# EAGLE board RS485_HiLowPWM_V1-autoR1 (EAGLE 6.3)
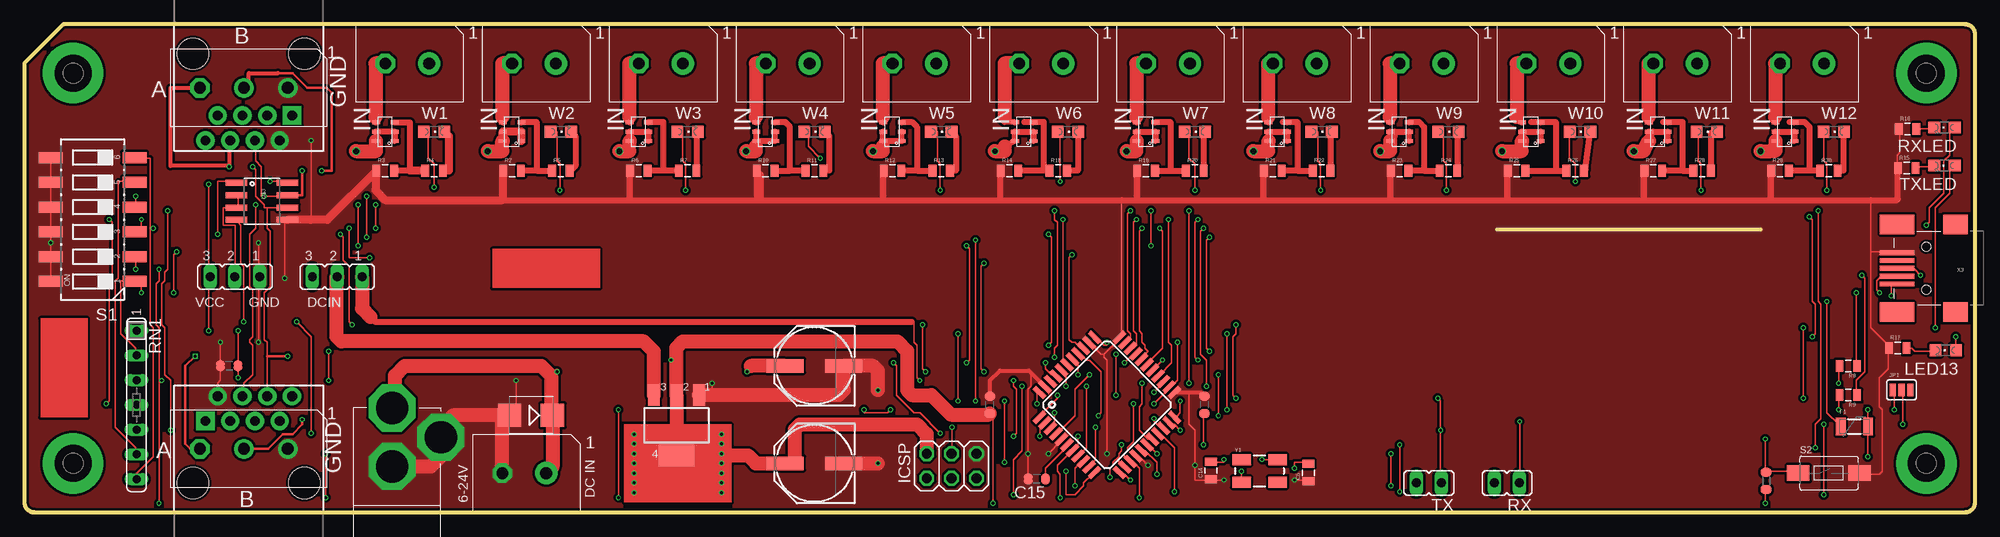
[diagram p0: board, top side]
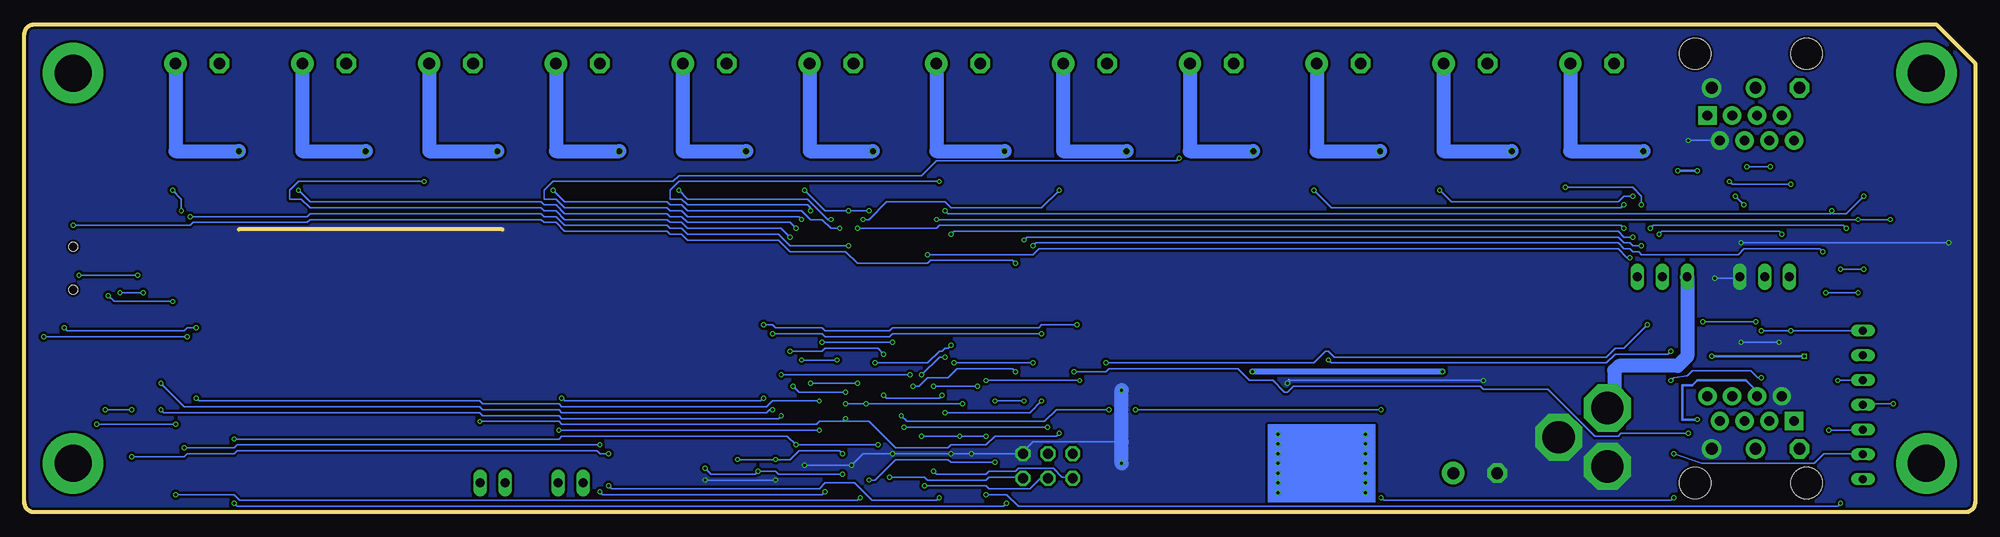
[diagram p1: board, bottom side, seen from below]

Size 200 x 50 mm. Coordinates in mm from the lower left corner, seen from the top.
Outline: 0,46 0,1 arc90 1,0 199,0 arc90 200,1 200,49 arc90 199,50 4,50 0,46
Copper layers (1*16): Top 0.035mm / dielectric 1.5mm / Bottom 0.035mm
Design rules "Fast_ChinaPCB-2012-6mil-off *": minimum track width 6mil, minimum drill 0.3mm, track to track 6mil, track to pad 6mil, pad to pad 6mil, via to via 6mil, smd to smd 6mil, copper to edge 10mil, drill to drill 15mil, minimum pad ring 8mil, minimum via ring 4mil, stop-mask expansion 2mil, vias tented up to drill 13mil, thermal gap 10mil
Net classes: 0 default: width 0.152 mm, drill 0.152 mm, clearance 0.152 mm; 1 power: width 0.152 mm, drill 0.152 mm, clearance 0.152 mm; 2 VIN: width 0.152 mm, drill 0.152 mm, clearance 0.305 mm
Milling: 1 lines

## Footprints (pad centres in the part's own frame; a part is rotated, then mirrored left to right if it is on the bottom)
C0603-ROUND = smd 0.898 x 1.1: 1 -0.889,0; 2 0.889,0
0805 = smd 0.8 x 1.2: 1 -0.9,0; 2 0.9,0
PANASONIC_E = smd 3.8 x 1.4: + 3,0; - -3,0
SMB = smd 2.4 x 2.4: A 2.2,0; C -2.2,0
PTC-1206 = smd 1 x 1.8: 1 -1.4,0; 2 1.4,0
TQFP44 = smd 1.5 x 0.5: 1 -5.8,4; 2 -5.8,3.2; 3 -5.8,2.4; 4 -5.8,1.6; 5 -5.8,0.8; 6 -5.8,0; 7 -5.8,-0.8; 8 -5.8,-1.6; 9 -5.8,-2.4; 10 -5.8,-3.2; 11 -5.8,-4; 23 5.8,-4; 24 5.8,-3.2; 25 5.8,-2.4; 26 5.8,-1.6; 27 5.8,-0.8; 28 5.8,0; 29 5.8,0.8; 30 5.8,1.6; 31 5.8,2.4; 32 5.8,3.2; 33 5.8,4 | smd 0.5 x 1.5: 12 -4,-5.8; 13 -3.2,-5.8; 14 -2.4,-5.8; 15 -1.6,-5.8; 16 -0.8,-5.8; 17 0,-5.8; 18 0.8,-5.8; 19 1.6,-5.8; 20 2.4,-5.8; 21 3.2,-5.8; 22 4,-5.8; 34 4,5.8; 35 3.2,5.8; 36 2.4,5.8; 37 1.6,5.8; 38 0.8,5.8; 39 0,5.8; 40 -0.8,5.8; 41 -1.6,5.8; 42 -2.4,5.8; 43 -3.2,5.8; 44 -4,5.8
SOT223 = smd 1.219 x 2.235: 1 -2.311,-3.099; 2 0,-3.099; 3 2.311,-3.099 | smd 3.6 x 2.2: 4 0,3.099
2X03 = drill 1.016 octagon: 1 -2.54,-1.27; 2 -2.54,1.27; 3 0,-1.27; 4 0,1.27; 5 2.54,-1.27; 6 2.54,1.27
SJ_3 = smd 0.635 x 1.27: 1 -0.889,0; 2 0,0; 3 0.889,0
JP2 = drill 0.914 long: 1 -2.54,0; 2 0,0; 3 2.54,0
SMTSO-256-ET = drill 3.81 pad 6.198: P$1 0,0
CHIPLED_0805 = smd 1.2 x 1.2: A 0,-1.05; C 0,1.05
RJ45-8 = drill 1 pad 1.88 square: 1 -4.445,6.35 | drill 1 pad 1.88: 2 -3.175,8.89; 3 -1.905,6.35; 4 -0.635,8.89; 5 0.635,6.35; 6 1.905,8.89; 7 3.175,6.35; 8 4.445,8.89 | hole 3.2: -5.715,0; 5.715,0
R0603-ROUND = smd 0.898 x 1.1: 1 -0.889,0; 2 0.889,0
SIL7 = drill 0.813 long: 1 -7.62,0; 2 -5.08,0; 3 -2.54,0; 4 0,0; 5 2.54,0; 6 5.08,0; 7 7.62,0
JP1 = drill 0.914 long: 1 0,-1.27; 2 0,1.27
CTS-219-06 = smd 1.13 x 2.44: 1 -6.35,-4.3; 2 -3.81,-4.3; 3 -1.27,-4.3; 4 1.27,-4.3; 5 3.81,-4.3; 6 6.35,-4.3; 7 6.35,4.3; 8 3.81,4.3; 9 1.27,4.3; 10 -1.27,4.3; 11 -3.81,4.3; 12 -6.35,4.3
TACTILE-SWITCH-1101NE = smd 2.3 x 1.6: P$1 -3.15,0; P$2 3.15,0
DECADE-NSS30201MR6T1G = smd 0.4 x 0.8: 1 -0.95,-0.95; 2 0,-0.95; 5 0,0.95; 6 -0.95,0.95; B 0.95,-0.95; E 0.95,0.95
DECADE-5MM-CON-1X2 = drill 1.2 pad 2.3: 1 4.5,0 | drill 1.2 pad 2 octagon: 2 0,0
SO08 = smd 0.61 x 2.21: 1 -1.905,-2.616; 2 -0.635,-2.616; 3 0.635,-2.616; 4 1.905,-2.616; 5 1.905,2.616; 6 0.635,2.616; 7 -0.635,2.616; 8 -1.905,2.616
DECADE-5MM-CON-1X3 = drill 1.2 pad 2: 1 9,0; 2 4.5,0 | drill 1.2 pad 2 octagon: 3 0,0
DC-21MM = drill 3.302 pad 4.826 octagon: 1 -5.08,-3.353; 2 -0.076,-6.35; 3 -0.076,-0.356
USB-MINIB-OLD = smd 2.5 x 2: 1 -3,-4.5; 2 -3,4.5 | smd 3.5 x 2: 3 3,-4.5; 4 3,4.5 | smd 3.5 x 0.5: D+ 3,0; D- 3,0.8; GND 3,-1.6; ID 3,-0.8; VBUS 3.01,1.61 | hole 0.9: 0,2.2; 0,-2.2
CRYSTAL-SMD-5X3 = smd 1.9 x 1.1: 1 -1.85,-1.15; 2 1.85,-1.15; 3 1.85,1.15; 4 -1.85,1.15

## Placement (x,y rotation side)
C3  100n  [C0603-ROUND]  121,11 90 top
C5  22p  [0805]  131.65,4.06 90 top
C6  100n  [C0603-ROUND]  21,15 180 top
C7  100n  [C0603-ROUND]  99,11 90 top
C8  47u  [PANASONIC_E]  81,5 180 top
C11  100uF  [PANASONIC_E]  81,15 180 top
C14  22p  [0805]  121.65,4.27 90 top
C15  100n  [C0603-ROUND]  103.8,3.41 180 top
D1  M7  [SMB]  51.95,9.93 180 top
F1  PTCSMD  [PTC-1206]  187.63,8.78 0 top
IC1  ATMEGA32U4-AU  [TQFP44]  111,11 45 top
IC4  MC33269ST-5  [SOT223]  66.85,8.91 180 top
ICSP  ICSP  [2X03]  95.06,4.74 0 top
JP1  PW_SW  [SJ_3]  192.46,12.54 0 top
JP3  PW_SOURCE  [JP2]  32.07,24.13 180 top
JP4  RS485_PW  [JP2]  21.57,24.13 180 top
JP10  M01-SMTSO-256-ET  [SMTSO-256-ET]  195,5 0 top
JP11  M01-SMTSO-256-ET  [SMTSO-256-ET]  5,5 0 top
JP12  M01-SMTSO-256-ET  [SMTSO-256-ET]  195,45 0 top
JP13  M01-SMTSO-256-ET  [SMTSO-256-ET]  5,45 0 top
LED13  [CHIPLED_0805]  196.99,16.59 90 top
OUT1  RJ45-8PTH  [RJ45-8]  23,47 180 top
OUT2  RJ45-8PTH  [RJ45-8]  23,3 0 top
R1  10k  [R0603-ROUND]  178.57,3.22 270 top
R2  10K  [0805]  50,35 0 top
R3  10K  [0805]  37,35 0 top
R4  1K  [0805]  42,35 0 top
R5  1K  [0805]  55,35 0 top
R6  10K  [0805]  63,35 0 top
R7  1K  [0805]  68,35 0 top
R8  22  [0805]  187,15 180 top
R9  22  [0805]  187,12 180 top
R10  10K  [0805]  76,35 0 top
R11  1K  [0805]  81,35 0 top
R12  10K  [0805]  89,35 0 top
R13  1K  [0805]  94,35 0 top
R14  10K  [0805]  101,35 0 top
R15  330  [0805]  192.99,35.27 0 top
R16  330  [0805]  193.07,39.27 0 top
R17  330  [0805]  192.07,16.84 0 top
R18  1K  [0805]  106,35 0 top
R19  10K  [0805]  115,35 0 top
R20  1K  [0805]  120,35 0 top
R21  10K  [0805]  128,35 0 top
R22  1K  [0805]  133,35 0 top
R23  10K  [0805]  141,35 0 top
R24  1K  [0805]  146,35 0 top
R25  10K  [0805]  153,35 0 top
R26  1K  [0805]  159,35 0 top
R27  10K  [0805]  167,35 0 top
R28  1K  [0805]  172,35 0 top
R29  10K  [0805]  180,35 0 top
R30  1K  [0805]  185,35 0 top
RN1  1K  [SIL7]  11.5,11 270 top
RX  RX_TXO  [JP1]  152,3 90 top
RXLED  [CHIPLED_0805]  196.86,39.43 90 top
S1  219-06  [CTS-219-06]  7,30 90 top
S2  RES  [TACTILE-SWITCH-1101NE]  185,4 0 top
TX  TX_RXI  [JP1]  144,3 90 top
TXLED  [CHIPLED_0805]  196.86,35.53 90 top
U$1  DECADE-NSS30201MR6T1G  [DECADE-NSS30201MR6T1G]  37,39 90 top
U$2  DECADE-5MM-CONN  [DECADE-5MM-CON-1X2]  37,46 0 top
U$3  RS485SOIC  [SO08]  24.36,31.86 270 top
U$4  DECADE-NSS30201MR6T1G  [DECADE-NSS30201MR6T1G]  50,39 90 top
U$5  DECADE-5MM-CONN  [DECADE-5MM-CON-1X2]  50,46 0 top
U$6  DECADE-NSS30201MR6T1G  [DECADE-NSS30201MR6T1G]  63,39 90 top
U$7  DECADE-5MM-CONN  [DECADE-5MM-CON-1X2]  63,46 0 top
U$8  DECADE-NSS30201MR6T1G  [DECADE-NSS30201MR6T1G]  76,39 90 top
U$9  DECADE-5MM-CONN  [DECADE-5MM-CON-1X2]  49,4 0 top
U$10  DECADE-LOGO-SMALL  [DECADE-LOGO-SMALL]  1.6,19.85 270 top
U$11  DECADE-5MM-CONN  [DECADE-5MM-CON-1X2]  76,46 0 top
U$12  DECADE-NSS30201MR6T1G  [DECADE-NSS30201MR6T1G]  89,39 90 top
U$13  DECADE-5MM-CONN  [DECADE-5MM-CON-1X2]  89,46 0 top
U$14  DECADE-NSS30201MR6T1G  [DECADE-NSS30201MR6T1G]  102.5,39 90 top
U$15  DECADE-5MM-CONN  [DECADE-5MM-CON-1X2]  102,46 0 top
U$16  DECADE-NSS30201MR6T1G  [DECADE-NSS30201MR6T1G]  115,39 90 top
U$17  DECADE-5MM-CONN  [DECADE-5MM-CON-1X2]  115,46 0 top
U$18  DECADE-NSS30201MR6T1G  [DECADE-NSS30201MR6T1G]  128.5,39 90 top
U$19  DECADE-5MM-CONN  [DECADE-5MM-CON-1X2]  128,46 0 top
U$20  DECADE-NSS30201MR6T1G  [DECADE-NSS30201MR6T1G]  141,39 90 top
U$21  DECADE-5MM-CONN  [DECADE-5MM-CON-1X2]  141,46 0 top
U$22  DECADE-NSS30201MR6T1G  [DECADE-NSS30201MR6T1G]  154.5,39 90 top
U$23  DECADE-5MM-CONN  [DECADE-5MM-CON-1X2]  154,46 0 top
U$24  DECADE-NSS30201MR6T1G  [DECADE-NSS30201MR6T1G]  167.5,39 90 top
U$25  DECADE-5MM-CONN  [DECADE-5MM-CON-1X2]  167,46 0 top
U$26  DECADE-NSS30201MR6T1G  [DECADE-NSS30201MR6T1G]  180.5,39 90 top
U$27  DECADE-5MM-CONN  [DECADE-5MM-CON-1X2]  180,46 0 top
U$28  DECADE-5MM-CON-1X3  [DECADE-5MM-CON-1X3]  18,6.5 0 top
U$29  DECADE-5MM-CON-1X3  [DECADE-5MM-CON-1X3]  18,43.5 0 top
U$30  LL-LUXURYLOGICO.COM  [DECADE-LL-LOGO-SMALL]  48,23 0 top
W1  [CHIPLED_0805]  42,39 270 top
W2  [CHIPLED_0805]  55,39 270 top
W3  [CHIPLED_0805]  68,39 270 top
W4  [CHIPLED_0805]  81,39 270 top
W5  [CHIPLED_0805]  94,39 270 top
W6  [CHIPLED_0805]  107,39 270 top
W7  [CHIPLED_0805]  120,39 270 top
W8  [CHIPLED_0805]  133,39 270 top
W9  [CHIPLED_0805]  146,39 270 top
W10  [CHIPLED_0805]  159.5,39 270 top
W11  [CHIPLED_0805]  172.5,39 270 top
W12  [CHIPLED_0805]  185.5,39 270 top
X1  DC21MMX  [DC-21MM]  37.62,4.33 180 top
X3  USBOLD  [USB-MINIB-OLD]  195,25 180 top
Y1  16Mhz  [CRYSTAL-SMD-5X3]  126.63,4.22 0 top

## Library data of the parts
C3 C6 C7 C15 R1 = SmartPrj
C5 C8 C11 C14 JP1 R4 R5 R7-R9 R11 R13 R15-R18 R20 R22 R24 R26 R28 R30 = SparkFun-Passives
D1 = diode
F1 = SparkFun-PowerIC
IC1 = adafruit
IC4 = linear
ICSP = pinhead
JP3 JP4 RX TX = jumper
JP10-JP13 OUT1 OUT2 X3 = SparkFun-Connectors
LED13 RXLED TXLED W1-W12 = led
R2 R3 R6 R10 R12 R14 R19 R21 R23 R25 R27 R29 = SparkFun-Resistors
RN1 = resistor-sil; OC_FARNELL: unknown; OC_NEWARK: unknown
S1 = switch-dil; OC_FARNELL: unknown; OC_NEWARK: unknown
S2 = SparkFun-Electromechanical
U$1 U$2 U$4-U$30 = DECADE-libraries
U$3 = SparkFun-DigitalIC
X1 = powersupply
Y1 = SparkFun-FreqCtrl

## Nets
+5V [power]: C6.1 C7.1 C8.+ IC4.2 IC4.4 ICSP.2 JP4.3 R1.2 RN1.1 U$3.8
A: OUT1.6 OUT2.6 U$3.6 U$28.3 U$29.3
B: OUT1.4 OUT2.4 U$3.7 U$28.2 U$29.2
D4: IC1.25 W11.A
D5: IC1.31 W5.A
D6: IC1.27 W4.A
D7: IC1.1 W10.A
D8: IC1.28 W9.A
D9: IC1.29 W3.A
D10: IC1.30 W2.A
D11: IC1.12 W1.A
D12: IC1.26 W8.A
D13: IC1.32 LED13.A W7.A
GND [power]: C3.2 C5.1 C6.2 C7.2 C8.- C11.- C14.1 C15.2 D1.A IC1.5 IC1.15 IC1.23 IC1.33 IC1.35 IC1.43 IC4.1 ICSP.6 JP4.1 OUT1.2 OUT2.2 R2.1 R3.1 R6.1 R10.1 R12.1 R14.1 R15.1 R16.1 R17.1 R19.1 R21.1 R23.1 R25.1 R27.1 R29.1 S1.7 S1.8 S1.9 S1.10 S1.11 S1.12 S2.P$2 U$3.5 U$9.2 U$28.1 U$29.1 X1.1 X1.3 X3.GND
MISO: IC1.11 ICSP.1
MOSI: IC1.10 ICSP.4
N$1: U$1.1 U$1.2 U$1.5 U$1.6 U$2.1
N$2: R4.2 W1.C
N$3: U$1.E U$2.2
N$4: R5.2 W2.C
N$5: R3.2 R4.1 U$1.B
N$6: C5.2 IC1.16 Y1.1
N$7: C14.2 IC1.17 Y1.3
N$8: R2.2 R5.1 U$4.B
N$9: U$4.1 U$4.2 U$4.5 U$4.6 U$5.1
N$10: U$4.E U$5.2
N$11: IC1.3 R8.2
N$12: IC1.4 R9.2
N$13: R8.1 X3.D-
N$14: R9.1 X3.D+
N$15: F1.1 X3.VBUS
N$16: R15.2 TXLED.C
N$17: R7.2 W3.C
N$18: C15.1 IC1.6
N$19: IC1.14 IC1.24 IC1.34 IC1.44 JP1.2
N$20: R6.2 R7.1 U$6.B
N$21: JP4.2 U$3.2 U$3.3
N$22: U$6.1 U$6.2 U$6.5 U$6.6 U$7.1
N$23: U$6.E U$7.2
N$24: R11.2 W4.C
N$25: R10.2 R11.1 U$8.B
N$26: U$8.1 U$8.2 U$8.5 U$8.6 U$11.1
N$27: U$8.E U$11.2
N$28: R13.2 W5.C
N$29: R12.2 R13.1 U$12.B
N$30: U$12.1 U$12.2 U$12.5 U$12.6 U$13.1
N$31: U$12.E U$13.2
N$32: R18.2 W6.C
N$33: R14.2 R18.1 U$14.B
N$34: U$14.1 U$14.2 U$14.5 U$14.6 U$15.1
N$35: U$14.E U$15.2
N$36: R20.2 W7.C
N$37: R16.2 RXLED.C
N$38: LED13.C R17.2
N$39: R19.2 R20.1 U$16.B
N$40: IC1.41 RN1.2 S1.1
N$41: IC1.40 RN1.3 S1.2
N$42: IC1.39 RN1.4 S1.3
N$43: IC1.38 RN1.5 S1.4
N$44: IC1.37 RN1.6 S1.5
N$45: IC1.36 RN1.7 S1.6
N$46: U$16.1 U$16.2 U$16.5 U$16.6 U$17.1
N$47: U$16.E U$17.2
N$48: R22.2 W8.C
N$49: R21.2 R22.1 U$18.B
N$50: U$18.1 U$18.2 U$18.5 U$18.6 U$19.1
N$51: U$18.E U$19.2
N$52: R24.2 W9.C
N$53: R23.2 R24.1 U$20.B
N$54: U$20.1 U$20.2 U$20.5 U$20.6 U$21.1
N$55: U$20.E U$21.2
N$56: R26.2 W10.C
N$57: R25.2 R26.1 U$22.B
N$58: U$22.1 U$22.2 U$22.5 U$22.6 U$23.1
N$59: U$22.E U$23.2
N$60: R28.2 W11.C
N$61: R27.2 R28.1 U$24.B
N$62: U$24.1 U$24.2 U$24.5 U$24.6 U$25.1
N$63: U$24.E U$25.2
N$64: R30.2 W12.C
N$65: R29.2 R30.1 U$26.B
N$66: U$26.1 U$26.2 U$26.5 U$26.6 U$27.1
N$67: U$26.E U$27.2
RESET: C3.1 IC1.13 ICSP.5 R1.1 S2.P$1
RX: IC1.20 RX.1 U$3.1
RXI: TX.2
SCK: IC1.9 ICSP.3
SCL: IC1.18 W6.A
SDA: IC1.19 W12.A
SS: IC1.8 RXLED.A
SUB_PW [VIN]: IC4.3 JP3.2
TX: IC1.21 TX.1 U$3.4
TXA: IC1.22 TXLED.A
TXO: RX.2
VBUS: F1.2 IC1.2 IC1.7 JP1.1 JP3.1
VIN [VIN]: C11.+ D1.C JP3.3 U$9.1 X1.2

## Tracks (layer width: path | path; a pad name or v marks a point on that pad's centre or on a via)
+5V  (via drill 0.3)
  Top 0.152: v21.9,18.6 C6.1 | v25.2,33.9 26.7,33.9 U$3.8 | v18.9,33.6 18.9,24.3 JP4.3 18.9,24 v18.9,18.6 | v178.5,0.9 178.5,2.1 R1.2 | v99.3,0.9 99.3,9.6 98.89,10 | v21.9,13.8 C6.1 | v31.2,16.5 v31.2,13.5 | C6.1 | v66.3,15.6 66.85,15.6
  Top 1.422: ICSP.2 92.5,6.03 92.5,8 91.5,9 79.5,9 79,8.5 79,5 C8.+ 75,5 74.19,5.82 IC4.4 IC4.2 66.85,15.6 66.85,16.85 67.5,17.5 89.5,17.5 90.5,16.5 90.5,12.5 91,12 93,12 95,10 98.89,10 C7.1
  Bottom 0.152: v21.9,18.6 v18.9,18.6 11.7,18.6 RN1.1 | v25.2,33.9 24.9,33.6 v18.9,33.6 | v178.5,0.9 178.2,0.6 99.6,0.6 v99.3,0.9 | v21.9,13.8 22.3,13.8 23,14.5 29,14.5 29.5,14 30.9,13.8 v31.2,13.5 | v31.2,16.5 31.5,16.2 36.9,16.2 37.8,15.3 66,15.3 v66.3,15.6
A  (via drill 0.3)
  Top 0.152: 24.9,31.2 24.6,31.2 24.6,31.5 23.7,32.4 23.7,35.1 v23.4,35.4 | 24.9,31.2 26.7,31.2 U$3.6 | 21,35.5 v21,35.4 | 21,38.1 OUT1.6 | 24.9,31.2 24.9,29.1 25.2,28.8 25.2,23.1 24.6,22.5 24.6,17.7 24.9,17.4 24.9,16 24.9,12 OUT2.6
  Top 0.254: U$28.3 17,6.5 16.5,7 16.5,15 v17.5,16 | v27,16 24.9,16
  Top 0.406: 21,38.1 21,35.5 15,35.5 15,43.5 U$29.3
  Bottom 0.152: v21,35.4 v23.4,35.4
  Bottom 0.254: v17.5,16 v27,16
B  (via drill 0.3)
  Top 0.152: U$3.7 26.7,32.4 v24.6,32.4 24.3,32.4 24.3,35.4 23.7,36 23.7,38.1 OUT1.4 | v23.7,31.5 23.7,29.1 23.1,28.5 23.1,23.1 23.4,22.8 23.4,18 23.1,17.7 23.1,17.4 23.4,17.1 23.4,14.1 22.5,13.2 22.5,12 OUT2.4
  Top 0.254: 26,45 27.5,45 29,43.5 31,43.5 31.5,43 31.5,35 v30.5,35 | U$28.2 25,6.5 26.5,8 27.5,8 28.5,9 v28.5,9.5 | v28.5,35 28.5,32.5 U$3.7
  Top 0.406: U$29.2 23,43.5 23,45 26,45
  Bottom 0.152: v24.6,32.4 v23.7,31.5
  Bottom 0.254: v28.5,9.5 30,9.5 30,13 29,13 28.5,13.5 23.5,13.5 22.5,12.5 22.5,12.03 OUT2.4 | v30.5,35 v28.5,35
D4  (via drill 0.3)
  Top 0.152: W11.A 171.6,39 171.6,36 171.9,35.7 v171.9,33 | v120.9,29.1 120.6,28.8 120.6,16.2 121.2,15.6 v121.2,12.9 | v115.8,12.3 116.7,13.2 IC1.25
  Bottom 0.152: v171.9,33 170.7,31.8 147,31.8 146.7,31.5 145.5,31.5 144.6,30.6 134.1,30.6 133.8,30.3 132.6,30.3 132,29.7 121.5,29.7 v120.9,29.1 | v121.2,12.9 120.6,12.3 v115.8,12.3
D5  (via drill 0.3)
  Top 0.152: W5.A 93.6,39 93.6,36 93.9,35.7 v93.9,33 | v114,30 113.7,29.7 113.7,18.6 114,18.3 114,17.1 113.7,16.8 IC1.31
  Bottom 0.152: v93.9,33 95.7,31.2 105,31.2 105.6,31.8 111.6,31.8 113.4,30 v114,30
D6  (via drill 0.3)
  Top 0.152: W4.A 80.4,39 80.4,37.5 v81.6,36.3 | v120.3,30 120,29.7 120,15.9 v120.3,15.6 | v116.7,15.6 115.8,14.7 IC1.27
  Bottom 0.152: v81.6,36.3 81.9,36 106.5,36 108,34.5 132.9,34.5 133.5,33.9 145.8,33.9 146.7,33 146.7,32.1 145.5,32.1 144.6,31.2 134.1,31.2 133.8,30.9 132.6,30.9 132,30.3 120.6,30.3 v120.3,30 | v116.7,15.6 v120.3,15.6
D7  (via drill 0.3)
  Top 0.152: W10.A 158.4,39 158.4,36.3 159,35.7 v159,33.9 | v121.5,28.2 121.2,27.9 121.2,16.8 v121.5,16.5 | v111.9,12 v111.9,16.2 | v105.9,12 105.9,11.7 104.1,9.9 IC1.1
  Bottom 0.152: v159,33.9 171.9,33.9 172.8,33 172.8,32.1 171.6,32.1 170.7,31.2 147,31.2 146.7,30.9 145.5,30.9 144.6,30 134.1,30 133.8,29.7 132.6,29.7 132,29.1 122.4,29.1 v121.5,28.2 | v121.5,16.5 118.2,16.5 117.9,16.8 112.5,16.8 v111.9,16.2 | v111.9,12 111.6,11.7 106.2,11.7 v105.9,12
D8  (via drill 0.3)
  Top 0.152: W9.A 145.5,39 145.5,36 145.8,35.7 v145.8,33 | v116.4,29.1 116.7,28.8 116.7,16.8 115.2,15.3 IC1.28
  Bottom 0.152: v145.8,33 144.6,31.8 134.1,31.8 133.8,31.5 132.6,31.5 132,30.9 120.3,30.9 119.4,30 118.2,30 117.3,29.1 v116.4,29.1
D9  (via drill 0.3)
  Top 0.152: W3.A 67.5,39 67.5,36 67.8,35.7 v67.8,33 | v36,29.1 v36,31.5 | v114.6,29.1 114.3,28.8 114.3,18.6 114.6,18.3 114.6,17.4 114.9,17.1 114.9,16.8 115.2,16.5 114.6,15.9 IC1.29
  Bottom 0.152: v67.8,33 66,31.2 36.3,31.2 v36,31.5 | v36,29.1 36.3,29.4 106.2,29.4 106.5,29.1 v114.6,29.1
D10  (via drill 0.3)
  Top 0.152: W2.A 54.6,39 54.6,36 54.9,35.7 v54.9,33 | v35.1,28.2 v35.1,32.4 | v105,28.5 105.3,28.2 105.3,17.4 v105,17.1 | v112.8,15.3 113.7,16.2 IC1.30
  Bottom 0.152: v54.9,33 53.7,31.8 36.6,31.8 36,32.4 v35.1,32.4 | v35.1,28.2 36,28.2 36.6,28.8 104.7,28.8 v105,28.5 | v105,17.1 105.3,16.8 105.6,16.8 105.9,16.5 106.2,16.5 107.4,15.3 v112.8,15.3
D11  (via drill 0.3)
  Top 0.152: W1.A 41.4,39 41.4,36.3 42,35.7 v42,33.3 | v34.2,27.3 v34.2,31.5 | v97.5,11.4 v97.5,27.9 | v100.5,5.1 v100.5,11.4 | v113.4,3.3 112.8,3.9 112.5,3.9 IC1.12
  Bottom 0.152: v42,33.3 35.1,33.3 34.2,32.4 v34.2,31.5 | v34.2,27.3 35.1,27.3 35.4,27.6 36,27.6 36.6,28.2 97.2,28.2 v97.5,27.9 | v100.5,11.4 v97.5,11.4 | v100.5,5.1 105,5.1 105.3,5.4 110.7,5.4 112.8,3.3 v113.4,3.3
D12  (via drill 0.3)
  Top 0.152: W8.A 132.6,39 132.6,36 132.9,35.7 v132.9,33 | v117.3,30 117.3,17.4 117.6,17.1 117.6,15.3 116.4,14.1 IC1.26
  Bottom 0.152: v132.9,33 132,32.1 119.7,32.1 117.6,30 v117.3,30
D13  (via drill 0.3)
  Top 0.152: W7.A 119.4,39 119.4,36.3 120,35.7 v120,33 | v113.4,30.9 113.1,30.6 113.1,18.6 113.4,18.3 113.4,17.7 113.1,17.4 IC1.32 | v198,18 198,16.8 LED13.A | v183.3,18 183.6,18.3 183.6,21.3 183.3,21.6 183.3,30 v183,30.3 | v115.5,30.9 v115.5,27.3
  Bottom 0.152: v120,33 117.9,30.9 v115.5,30.9 v113.4,30.9 | v183.3,18 v198,18 | v183,30.3 171,30.3 170.7,30.6 147,30.6 146.7,30.3 145.5,30.3 144.6,29.4 134.1,29.4 133.8,29.1 132.6,29.1 132,28.5 122.7,28.5 121.5,27.3 v115.5,27.3
GND  (via drill 0.3)
  Top 0.152: 119.4,12.3 119.4,12.27 119.4,9 120,8.4 v120,4.8 120,3.3 121.5,3.3 C14.1 121.8,3.3 v123,3.3 | v130.2,3.3 131.4,3.3 C5.1 | v115.2,4.8 114.3,5.7 114,5.7 IC1.15 | C15.2 102.9,3.6 v102.9,6 102.9,12.6 103.2,12.9 103.2,14.1 103.29,14.19 | v105,6 106.2,7.2 IC1.5 | v50.4,13.5 50.4,10.2 D1.A | 70.5,12.01 v70.5,13.2 | S2.P$2 188.4,3.9 190.2,3.9 190.5,4.2 190.5,10.5 190.2,10.8 190.2,13.8 191.1,14.7 191.1,16.8 R17.1 191.1,17.1 189.3,18.9 189.3,26.7 | S1.12 S1.11 v2.7,27.6 S1.10 S1.9 S1.8 S1.7 | C6.2 20.1,13.5 19.8,13.2 19.8,12 OUT2.2 | 110.7,16.2 110.4,16.2 109.5,17.1 109.2,17.1 IC1.35 | 110.7,16.2 112.2,17.7 IC1.33 112.5,18 112.5,32 | R16.1 192.3,39 192.3,36.9 192,36.6 192,35.4 R15.1 | v26.7,24 26.7,29.7 U$3.5 | 189.3,26.7 192,26.7 X3.GND | 189.3,32 189.3,26.7 | 29.4,29.96 v29.4,38.1 | v20.1,17.4 C6.2 | v24,17.4 24,24 JP4.1 24,24.3 v24,27.6 | C6.2 | v111,6 111,15.6 110.7,15.9 110.7,16.2
  Top 0.406: C7.2 99,13.5 100,14.5 102.97,14.5 103.29,14.19 IC1.43 | IC1.23 119.4,12.27 120.62,12.27 C3.2
  Top 0.61: R2.1 49,34.9 49,32 62,32 | 62,32 62.1,32.1 R6.1 62,34.9 62,32 | 62,32 75.5,32 | 75.5,32 75.1,32.4 R10.1 75.5,34.6 75.5,32 | 75.5,32 88,32 | 88,32 88.1,32.1 R12.1 88,34.9 88,32 | 88,32 100,32 | 100,32 100.1,32.1 R14.1 100,34.9 100,32 | 100,32 112.5,32 114,32 | 114,32 114.1,32.1 R19.1 114,34.9 114,32 | 114,32 127,32 | 127,32 127.1,32.1 R21.1 127,34.9 127,32 | 127,32 140,32 | 140,32 140.1,32.1 R23.1 140,34.9 140,32 | 140,32 152,32 | 152,32 152.1,32.1 R25.1 152,34.9 152,32 | 152,32 166,32 | 166,32 166.1,32.1 R27.1 166,34.9 166,32 | 166,32 179,32 | 179,32 179.1,32.1 R29.1 179,34.9 179,32 | 179,32 189.3,32 192,32 192.09,32.09 R15.1
  Top 0.813: U$3.5 29.4,29.96 31.06,29.96 R3.1 36,34.9 36,33 37,32 49,32 49.1,32.1 R2.1
  Top 1.422: D1.A 49,9.93 | 49,9.93 43.93,9.93 43,9 43,7.99 X1.1 43,7.38 43,6 41.69,4.69 X1.3 | U$9.2 49,9.93 | C8.- v87.5,5 | v87.5,12.5 87.5,14.5 87,15 C11.- 84,12.5 83.51,12.01 70.5,12.01 IC4.1
  Bottom 0.152: v123,3.3 v130.2,3.3 | v120,4.8 v115.2,4.8 114,6 v111,6 v105,6 v102.9,6 97.8,6 ICSP.6 97.5,6.3 96.6,7.2 87.5,7.2 | v50.4,13.5 70.2,13.5 v70.5,13.2 | v26.7,24 24.3,24 JP4.1 | v29.4,38.1 26.4,38.1 OUT1.2 | v24,17.4 v20.1,17.4 | v24,27.6 v2.7,27.6
  Bottom 1.422: v87.5,5 87.5,7.2 v87.5,12.5
  pour Top (isolate 0.254, no thermals): 0,50 199.5,50 199.5,1 arc-90 198.5,0 1,0 arc-90 0,1
  pour Bottom (isolate 0.254, no thermals): 0,50 198.59,50 arc-45 199.29,49.71 200,49 200,1.41 arc-45 199.71,0.71 199,0 1.41,0 arc-45 0.71,0.29 0,1
MISO  (via drill 0.3)
  Top 0.152: v106.8,4.2 106.8,1.8 107.7,1.8 108.6,2.7 108.6,3 109.5,3.9 IC1.11
  Bottom 0.152: v106.8,4.2 106.5,3.9 101.4,3.9 101.1,4.2 98.4,4.2 98.1,4.5 94.5,4.5 93.6,3.6 92.7,3.6 ICSP.1
MOSI  (via drill 0.3)
  Top 0.152: v109.8,8.7 109.8,5.4 109.2,4.8 IC1.10 | v95.1,8.7 95.1,6.3 ICSP.4
  Bottom 0.152: v95.1,8.7 v109.8,8.7
N$1  (via drill 0.6)
  Top 0.61: U$1.1 U$1.2 U$1.5 U$1.6
  Top 1.422: v34,37 36.05,37 U$1.6
  Bottom 1.422: U$2.1 41.5,37 v34,37
N$2
  Top 0.813: W1.C 43.5,38.55 43.5,35 R4.2
N$3
  Top 0.61: U$1.E 36,39.95 36,40.5
  Top 1.422: U$2.2 36,46 36,40.5
N$4
  Top 0.61: W2.C 56.5,38.55 56.5,35.5 56,35 R5.2
N$5
  Top 0.61: U$1.B 39.5,39.95 39.5,35 R3.2
  Top 0.813: R4.1 39.5,35
N$6  (via drill 0.3)
  Top 0.152: v130.2,4.5 130.2,5.1 131.4,5.1 C5.2 | v124.8,4.2 124.8,3.3 Y1.1 | v116.1,3.9 116.1,5.1 114.9,6.3 114.6,6.3 IC1.16
  Bottom 0.152: v130.2,4.5 129.6,3.9 125.1,3.9 v124.8,4.2 123,4.2 122.7,3.9 v116.1,3.9
N$7  (via drill 0.3)
  Top 0.152: v123,5.4 123,5.1 121.8,5.1 C14.2 | v126.9,5.4 128.4,5.4 Y1.3 | v116.1,6 115.5,6.6 115.2,6.6 IC1.17
  Bottom 0.152: v126.9,5.4 v123,5.4 121.5,5.4 120.6,6.3 116.4,6.3 v116.1,6
N$8
  Top 0.61: U$4.B 51,40 52.5,40 52.5,35 | 52.5,35 R2.2 | 52.5,35 R5.1
N$9  (via drill 0.6)
  Top 0.813: U$4.6 U$4.5 U$4.2 U$4.1
  Top 1.422: v47.5,37 49,37 49,38 U$4.6
  Bottom 1.422: U$5.1 54.5,37 v47.5,37
N$10
  Top 0.61: U$4.E 49,40 49,40.5
  Top 1.422: U$5.2 49,46 49,40.5
N$11  (via drill 0.3)
  Top 0.152: v105.6,10.2 105.6,9 105.3,8.7 IC1.3 | v95.7,18.3 v95.7,11.4 | v123.3,10.5 v123.3,18.3 | v186,13.2 186,15 R8.2
  Bottom 0.152: v105.6,10.2 96.9,10.2 v95.7,11.4 | v95.7,18.3 111,18.3 111.3,18 117.9,18 118.2,18.3 v123.3,18.3 | v123.3,10.5 123.6,10.5 123.9,10.2 144.9,10.2 145.2,10.5 153,10.5 153.3,10.8 183.6,10.8 v186,13.2
N$12  (via drill 0.3)
  Top 0.152: v186,10.5 186,12 R9.2 | v122.4,14.1 v122.4,9.9 | v109.2,14.1 107.7,12.6 107.7,9.9 105.9,8.1 IC1.4
  Bottom 0.152: v186,10.5 185.7,10.2 153.3,10.2 153,9.9 145.2,9.9 144.9,9.6 122.7,9.6 v122.4,9.9 | v109.2,14.1 v122.4,14.1
N$13  (via drill 0.3)
  Top 0.152: v187.8,22.5 187.8,15 R8.1 | v190.2,22.5 189.9,22.8 189.9,23.7 190.5,24.3 192,24.3 X3.D-
  Bottom 0.152: v190.2,22.5 v187.8,22.5
N$14  (via drill 0.3)
  Top 0.152: v188.4,24.3 188.7,24 188.7,14.4 187.8,13.5 187.8,12 R9.1 | v194.4,24.3 193.8,24.9 192,24.9 X3.D+
  Bottom 0.152: v194.4,24.3 v188.4,24.3
N$15  (via drill 0.3)
  Top 0.152: v184.8,21.6 184.8,10.2 186,9 F1.1 | v191.4,22.2 191.4,23.4 191.7,23.4 X3.VBUS
  Bottom 0.152: v184.8,21.6 190.8,21.6 v191.4,22.2
N$16
  Top 0.152: R15.2 194.1,35.4 195.6,35.4 TXLED.C
N$17
  Top 0.61: W3.C 68.9,38.85 R7.2
N$18
  Top 0.152: C15.1 104.7,3.6 104.7,4.5 106.8,6.6 IC1.6
N$19  (via drill 0.3)
  Top 0.152: v103.8,11.1 103.8,12.3 IC1.44 | v115.8,11.1 117.3,12.6 IC1.24 117.6,12.9 118.2,13.5 v118.2,17.4 | v111,17.4 111,17.1 110.7,17.1 110.1,17.7 109.8,17.7 IC1.34 | v192.6,9 192.6,12.3 JP1.2 | v184.5,1.8 v184.5,9 | v114.3,1.5 114.3,4.5 113.7,5.1 IC1.14 113.4,5.1 112.8,5.7 112.8,6 113.1,6.3 113.1,6.6 113.7,7.2 v113.7,11.1
  Bottom 0.152: v115.8,11.1 v113.7,11.1 v103.8,11.1 | v118.2,17.4 v111,17.4 | v184.5,9 v192.6,9 | v184.5,1.8 178.5,1.8 177.9,1.2 114.6,1.2 v114.3,1.5
N$20
  Top 0.61: U$6.B 64,40 65.5,40 65.5,35 | 65.5,35 R6.2 | R7.1 65.5,35
N$21
  Top 0.152: JP4.2 21.6,24.3 21.6,29.4 20.4,29.4 20.4,31.2 21.6,31.2 U$3.3 21.9,31.5 21.9,32.4 U$3.2
N$22  (via drill 0.6)
  Top 0.61: U$6.6 62,38.1 62,38.5 62.05,38.55 U$6.5 U$6.2 U$6.1
  Top 1.422: v61,37 62,37 U$6.6
  Bottom 1.422: U$7.1 67.5,37 v61,37
N$23
  Top 0.61: U$6.E 62,40 62,40.5
  Top 1.422: U$7.2 62,46 62,40.5
N$24
  Top 0.61: W4.C 82.5,38.55 82.5,35 R11.2
N$25
  Top 0.61: R10.2 78.5,35 | R11.1 78.5,35 | 78.5,35 78.5,39.5 78,40 77.95,39.95 U$8.B
N$26  (via drill 0.6)
  Top 0.61: 75,37.5 75.05,37.55 U$8.6 | U$8.6 U$8.5 | U$8.2 U$8.1 U$8.6
  Top 1.422: v74,37 75,37 75,37.5
  Bottom 1.422: U$11.1 80.5,37 v74,37
N$27
  Top 0.61: U$8.E 75,40 75,40.5
  Top 1.422: U$11.2 75,46 75,40.5
N$28
  Top 0.61: W5.C 95.5,38.55 95.5,35 R13.2
N$29
  Top 0.61: U$12.B 90,40 91,40 91.5,39.5 91.5,35 | 91.5,35 R12.2 | 91.5,35 R13.1
N$30  (via drill 0.6)
  Top 0.61: 88,37.5 88.05,37.55 U$12.6 | U$12.6 U$12.5 | U$12.6 U$12.1 U$12.2
  Top 1.422: v87,37 88,37 88,37.5
  Bottom 1.422: U$13.1 93.5,37 v87,37
N$31
  Top 0.61: 88,40.5 88.05,40.45 U$12.E
  Top 1.422: U$13.2 88,46 88,40.5
N$32
  Top 0.61: W6.C 108,38.95 108,35 R18.2
N$33
  Top 0.61: U$14.B 102.5,40 104.5,40 104.5,35 | R18.1 104.5,35 | 104.5,35 R14.2
N$34  (via drill 0.5)
  Top 0.61: U$14.1 U$14.2 U$14.5 U$14.6 100.55,37.55 100.5,37.5
  Top 1.422: v99.5,37 100.5,37 100.5,37.5
  Bottom 1.422: U$15.1 106.5,37 v99.5,37
N$35
  Top 0.61: U$14.E 100.5,40 100.5,40.5
  Top 1.422: U$15.2 100.5,46 100.5,40.5
N$36
  Top 0.61: W7.C 120.9,38.85 R20.2
N$37
  Top 0.152: R16.2 194.1,39.3 195.6,39.3 RXLED.C
N$38
  Top 0.152: R17.2 193.2,16.8 193.5,16.8 193.8,16.5 195.9,16.5 LED13.C
N$39
  Top 0.61: U$16.B 116,40 117.5,40 117.5,35 R19.2 R20.1
N$40  (via drill 0.3)
  Top 0.152: RN1.2 11.4,16.2 11.4,16.8 9.9,18.3 9.9,23.7 11.1,23.7 S1.1 11.4,23.7 11.7,23.7 12,23.4 v12,22.5 | v104.7,15.3 104.7,14.7 105.3,14.1 105.6,14.1 IC1.41 | v96.6,15.3 96.9,15.6 96.9,27 v96.6,27.3 | v15.6,26.7 15.3,26.4 v15.3,22.5
  Bottom 0.152: v96.6,15.3 v104.7,15.3 | v96.6,27.3 96.3,27.6 36.6,27.6 36,27 35.4,27 35.1,26.7 34.5,26.7 34.2,26.4 24.3,26.4 23.7,27 15.9,27 v15.6,26.7 | v12,22.5 v15.3,22.5
N$41  (via drill 0.3)
  Top 0.152: v106.8,12.9 106.8,14.4 106.5,14.4 IC1.40 | v102.3,12.9 102.3,6.3 101.4,5.4 v101.4,1.8 | 13.8,13.2 v13.8,0.9 | v14.1,13.5 13.8,13.2 | v11.4,24.9 11.4,26.1 S1.2 | v13.8,24.9 13.8,23.7 13.5,23.4 13.5,19.2 13.8,18.9 13.8,13.2
  Bottom 0.152: v102.3,12.9 v106.8,12.9 | v101.4,1.8 99.3,1.8 98.1,0.6 14.1,0.6 v13.8,0.9 | v14.1,13.5 11.7,13.5 RN1.3 | v13.8,24.9 v11.4,24.9
N$42  (via drill 0.3)
  Top 0.152: v106.5,30 106.5,15.3 106.8,15.3 IC1.39 | v12,30 12,29.1 11.4,28.5 S1.3 | v8.4,11.1 8.7,11.4 8.7,23.7 9,24 9,29.7 v8.7,30
  Bottom 0.152: v106.5,30 v12,30 v8.7,30 | v8.4,11.1 11.4,11.1 RN1.4
N$43  (via drill 0.3)
  Top 0.152: v108,14.1 108,15.3 107.7,15.6 IC1.38 | v105.6,15.9 105.6,16.8 105.9,17.1 105.9,29.7 105.6,30 v105.6,30.9 | v11.4,32.4 11.4,31.5 S1.4 | v15,8.4 15,13.5 14.4,14.1 14.4,18.9 14.1,19.2 14.1,23.4 14.4,23.7 14.4,24.6 14.7,24.9 v14.7,30.9
  Bottom 0.152: v108,14.1 106.2,15.9 v105.6,15.9 | v105.6,30.9 105.3,30.6 14.7,30.6 | 14.7,30.6 13.2,30.6 v11.4,32.4 | v15,8.4 11.7,8.4 RN1.5 | 14.7,30.6 v14.7,30.9
N$44  (via drill 0.3)
  Top 0.152: S1.5 11.1,33.9 9.6,33.9 9.6,24 9.3,23.7 9.3,8.7 11.4,6.6 11.4,6 RN1.6 | v110.1,9.9 110.4,10.2 110.4,14.4 109.2,15.6 108.9,15.6 108.3,16.2 IC1.37 | v88.8,10.5 88.5,10.2 86.1,10.2 v86.1,10.5 | v60.9,1.5 v60.9,10.5 | v30.9,6 v30.9,1.5
  Bottom 0.152: v110.1,9.9 109.5,9.3 95.4,9.3 94.2,10.5 v88.8,10.5 | v60.9,10.5 v86.1,10.5 | v60.9,1.5 60.6,1.2 31.2,1.2 v30.9,1.5 | v30.9,6 28,5 16.5,5 15.5,6 11.7,6 RN1.6
N$45  (via drill 0.3)
  Top 0.152: 12.9,29.1 12.9,19.2 13.2,18.9 13.2,5.7 11.4,3.9 11.4,3.6 RN1.7 | 12.9,29.1 12.9,36.3 11.4,36.3 S1.6 | v107.4,26.4 107.1,26.1 107.1,17.7 107.4,17.4 107.7,17.4 108.3,16.8 IC1.36 | v35.4,26.1 33.3,26.1 v33.3,29.1 | 12.9,29.1 v13.2,29.1
  Bottom 0.152: v107.4,26.4 96.6,26.4 96,27 36.6,27 35.7,26.1 v35.4,26.1 | v33.3,29.1 33,29.4 13.5,29.4 v13.2,29.1
N$46  (via drill 0.6)
  Top 0.61: U$16.6 U$16.5 U$16.2 U$16.1
  Top 1.422: v113,37 114,37 U$16.6
  Bottom 1.422: U$17.1 119.5,37 v113,37
N$47
  Top 0.61: 114,40.5 114.05,40.45 U$16.E
  Top 1.422: U$17.2 114,46 114,40.5
N$48
  Top 0.61: W8.C 133.9,38.85 R22.2
N$49
  Top 0.61: U$18.B 129,40 130.5,40 130.5,35 | 130.5,35 R21.2 | 130.5,35 R22.1
N$50  (via drill 0.6)
  Top 0.61: U$18.6 U$18.5 U$18.2 U$18.1
  Top 1.422: v126,37 127.5,37 U$18.6
  Bottom 1.422: U$19.1 132.5,37 v126,37
N$51
  Top 0.61: 127.5,40.5 U$18.E
  Top 1.422: U$19.2 127.5,46 127.5,40.5
N$52
  Top 0.61: W9.C 146.9,38.85 R24.2
N$53
  Top 0.61: U$20.B 142,40 143,40 143.5,39.5 143.5,35 | 143.5,35 R23.2 | 143.5,35 R24.1
N$54  (via drill 0.6)
  Top 0.61: U$20.5 U$20.6 140.5,38.5 140.5,39 U$20.2 U$20.1
  Top 1.422: v139,37 140,37 140.05,37.05 U$20.6
  Bottom 1.422: U$21.1 145.5,37 v139,37
N$55
  Top 0.61: 140,40.5 140.05,40.45 U$20.E
  Top 1.422: U$21.2 140,46 140,40.5
N$56
  Top 0.61: R26.2 160.05,35.15 W10.C
N$57
  Top 0.61: U$22.B 154.5,40 157,40 157,35 | R25.2 157,35 | 157,35 R26.1
N$58  (via drill 0.6)
  Top 0.61: U$22.6 U$22.5 U$22.2 U$22.1
  Top 1.422: v151.5,37 153.5,37 U$22.6
  Bottom 1.422: U$23.1 158.5,37 v151.5,37
N$59
  Top 0.61: 153,40.5 152.55,40.45 U$22.E
  Top 1.422: U$23.2 153,46 153,40.5
N$60
  Top 0.61: W11.C 172.9,38.85 R28.2
N$61
  Top 0.61: U$24.B 168,40 170,40 170,35 | 170,35 R27.2 | 170,35 R28.1
N$62  (via drill 0.6)
  Top 0.61: U$24.5 U$24.6 167,39 U$24.2 U$24.1
  Top 1.422: v165,37 166,37 166.05,37.05 U$24.6
  Bottom 1.422: U$25.1 171.5,37 v165,37
N$63
  Top 0.61: 166.5,40.5 U$24.E
  Top 1.422: U$25.2 166.5,46 166.5,40.5
N$64
  Top 0.61: W12.C 186.5,38.55 186.5,35 R30.2
N$65
  Top 0.61: U$26.B 181,40 182.5,40 183,39.5 183,35 | 183,35 R29.2 | R30.1 183,35
N$66  (via drill 0.6)
  Top 0.61: U$26.6 U$26.5 U$26.2 U$26.1
  Top 1.422: v178,37 179,37 179.55,37.05 U$26.6
  Bottom 1.422: U$27.1 184.5,37 v178,37
N$67
  Top 0.61: 179.5,40.5 U$26.E
  Top 1.422: U$27.2 179.5,46 179.5,40.5
N$68  (via drill 0.3)
  other vias: 62.5,8
N$69  (via drill 0.3)
  other vias: 62.5,7
N$70  (via drill 0.3)
  other vias: 62.5,6
N$71  (via drill 0.3)
  other vias: 62.5,5
N$72  (via drill 0.3)
  other vias: 62.5,4
N$73  (via drill 0.3)
  other vias: 62.5,3
N$74  (via drill 0.3)
  other vias: 62.5,2
N$75  (via drill 0.3)
  other vias: 71.5,8
N$76  (via drill 0.3)
  other vias: 71.5,7
N$77  (via drill 0.3)
  other vias: 71.5,6
N$78  (via drill 0.3)
  other vias: 71.5,5
N$79  (via drill 0.3)
  other vias: 71.5,4
N$80  (via drill 0.3)
  other vias: 71.5,3
N$81  (via drill 0.3)
  other vias: 71.5,2
RESET  (via drill 0.3)
  Top 0.152: S2.P$1 181.8,3.9 181.2,3.9 180.9,4.2 178.8,4.2 R1.1 178.5,4.2 v178.5,7.5 | v120.9,6.9 120.9,9.9 C3.1 | v112.5,6.9 112.5,6.3 112.2,6 112.2,5.7 | 112.2,5.7 112.2,5.1 112.8,4.5 IC1.13 | v111.3,3.6 111.3,4.5 111.6,4.8 111.6,5.1 112.2,5.7
  Bottom 0.152: v112.5,6.9 v120.9,6.9 121.8,7.8 144.9,7.8 145.2,7.5 v178.5,7.5 | v111.3,3.6 107.7,3.6 107.4,3.3 101.4,3.3 101.1,3.6 97.8,3.6 ICSP.5
RX  (via drill 0.3)
  Top 0.152: v115.8,9.6 115.8,9.3 116.4,8.7 116.7,8.7 IC1.20 | v153.3,9.3 153.3,3 RX.1 | v19.8,28.5 19.8,33.9 21.6,33.9 U$3.1 | v32.4,28.5 32.7,28.2 32.7,25.8 33.3,25.2 33.3,19.5 v33.6,19.2 | v89.1,15.3 89.4,15 89.4,12 91.2,10.2 91.8,10.2 v93.9,8.1
  Bottom 0.152: 116.1,9.3 v115.8,9.6 | 116.1,9.3 118.5,9.3 118.8,9 144.9,9 145.2,9.3 v153.3,9.3 | v19.8,28.5 20.1,28.8 32.1,28.8 v32.4,28.5 | v33.6,19.2 36,16.8 36.9,16.8 37.8,15.9 65.7,15.9 66.3,16.5 66.6,16.5 67.8,15.3 v89.1,15.3 | v93.9,8.1 94.2,7.8 100.5,7.8 101.4,6.9 105,6.9 105.3,6.6 110.7,6.6 113.4,9.3 116.1,9.3
SCK  (via drill 0.3)
  Top 0.152: v107.7,2.7 107.7,4.5 108.3,5.1 IC1.9
  Bottom 0.152: v107.7,2.7 101.4,2.7 101.1,2.4 96.9,2.4 95.7,3.6 95.1,3.6 ICSP.3
SCL  (via drill 0.3)
  Top 0.152: v106.2,33.9 106.2,39 W6.A | v119.4,13.2 v119.4,30.9 | v114.6,13.2 114.6,11.1 114.3,10.8 114.3,8.4 115.2,7.5 115.5,7.5 IC1.18
  Bottom 0.152: v106.2,33.9 132.9,33.9 133.8,33 133.8,32.1 132.6,32.1 132,31.5 119.7,31.5 119.4,31.2 v119.4,30.9 | v114.6,13.2 v119.4,13.2
SDA  (via drill 0.3)
  Top 0.152: W12.A 184.5,39 184.5,36 184.8,35.7 v184.8,33 | v183.9,30.9 183.9,21.6 184.2,21.3 184.2,9.6 183.6,9 v183.6,6.6 | v141,2.1 v141,6.9 | v117.9,2.1 117.9,6.6 116.4,8.1 IC1.19
  Bottom 0.152: v184.8,33 183.9,32.1 v183.9,30.9 | v183.6,6.6 178.5,6.6 178.2,6.9 v141,6.9 | v141,2.1 140.7,1.8 118.2,1.8 v117.9,2.1
SS  (via drill 0.3)
  Top 0.152: v195,29.4 195.3,29.7 195.3,31.2 196.8,32.7 196.8,36 197.4,36.6 197.4,39.3 197.7,39.3 RXLED.A | v98.4,25.5 98.1,25.2 98.1,14.7 v98.4,14.4 | v108.9,12.9 108.9,6.6 108.3,6 IC1.8
  Bottom 0.152: v195,29.4 183,29.4 182.7,29.7 171,29.7 170.7,30 147,30 146.7,29.7 145.5,29.7 144.6,28.8 134.1,28.8 133.8,28.5 132.6,28.5 132,27.9 122.7,27.9 121.5,26.7 115.8,26.7 114.6,25.5 107.4,25.5 107.1,25.8 98.7,25.8 v98.4,25.5 | v98.4,14.4 98.7,14.7 104.4,14.7 105.3,13.8 107.4,13.8 108.3,12.9 v108.9,12.9
SUB_PW
  Top 1.422: IC4.3 64.54,16.46 63.5,17.5 32.5,17.5 32,18 32,24.06 JP3.2
TX  (via drill 0.3)
  Top 0.152: v118.5,8.4 117.9,9 117.6,9 IC1.21 | TX.1 145.2,3 v145.2,8.4 145.2,11.4 v144.9,11.7 | v22.5,19.5 22.5,25.2 22.2,25.5 22.2,29.4 21.9,29.7 U$3.4 | v27.9,19.5 29.4,18 v29.4,8.1 | v92.4,14.4 92.1,14.7 v92.1,19.2 | v124.2,19.2 124.2,18.3 123.9,18 123.9,12 v124.2,11.7
  Bottom 0.152: v145.2,8.4 v118.5,8.4 | v27.9,19.5 v22.5,19.5 | v29.4,8.1 36.3,8.1 36.6,7.8 39,7.8 43.8,12.6 50.4,12.6 50.7,12.9 69.9,12.9 70.5,12.3 70.8,12.3 72,13.5 74.4,13.5 75.6,14.7 88.8,14.7 89.1,14.4 v92.4,14.4 | v92.1,19.2 95.7,19.2 96,18.9 111,18.9 111.3,18.6 117.9,18.6 118.2,18.9 123,18.9 123.3,19.2 v124.2,19.2 | v124.2,11.7 124.5,11.4 144.6,11.4 v144.9,11.7
TXA  (via drill 0.3)
  Top 0.152: v195.9,18.9 195.9,31.2 197.4,32.7 197.4,35.4 197.7,35.4 TXLED.A | v182.4,11.7 v182.4,18.9 | v118.5,11.4 118.5,10.2 118.2,9.9 118.2,9.6 IC1.22
  Bottom 0.152: v195.9,18.9 195.6,18.6 183.6,18.6 183.3,18.9 v182.4,18.9 | v182.4,11.7 182.1,11.4 153.3,11.4 153,11.1 145.2,11.1 144.9,10.8 123.9,10.8 123.3,11.4 v118.5,11.4
VBUS  (via drill 0.3)
  Top 0.152: v191.7,10.5 191.7,12.3 JP1.1 | v189,10.5 189,9 F1.2 189,8.7 v189,5.7 | v104.1,7.8 104.1,8.7 104.4,9 IC1.2 | v108,7.8 108,6.9 107.7,6.6 IC1.7 107.4,6.3 105.9,4.8 105.9,4.2 106.2,3.9 v106.2,1.5 | v101.4,7.8 101.7,8.1 101.7,12.6 101.4,12.9 v101.4,13.5 | v91.8,13.5 91.5,13.8 91.5,17.1 91.2,17.4 91.2,19.5 91,19.5 | v140.1,2.7 v140.1,6
  Top 0.61: 35.5,20 36,19.5 91,19.5
  Top 1.422: JP3.1 34.61,20.89 35.5,20
  Bottom 0.152: v189,10.5 v191.7,10.5 | v108,7.8 v104.1,7.8 v101.4,7.8 | v91.8,13.5 v101.4,13.5 | v189,5.7 183.6,5.7 183.3,6 178.5,6 178.2,6.3 141.3,6.3 141,6 v140.1,6 | v140.1,2.7 139.8,2.4 118.5,2.4 117.9,3 114.9,3 113.1,1.2 106.5,1.2 v106.2,1.5
VIN  (via drill 0.3)
  Top 0.61: v74.1,14.4 74.5,15 | v54.6,14.4 54,14
  Top 1.422: X1.2 38,10.68 38,14 39,15 53,15 54,14 54,10.08 D1.C 54.15,4.65 U$9.1 | C11.+ 74.5,15
  Bottom 0.61: v54.6,14.4 v74.1,14.4
  Bottom 1.422: JP3.3 29.53,15.97 30.5,15 36.5,15 37,14.5 37,11.38 X1.2
(copper drawn outside any net)
  shapes: Bottom area x1, Top area x1

## Text on the board
tPlace: B | A | GND | IN | IN | IN | IN | IN | IN | IN | IN | IN | IN | IN | IN | VCC | GND | DCIN | A | GND | DC IN | 6-24V | B
200bmp: CENTURION | Multi-Control System | Digital I/O Board